# Altium PCB PCB_WPOWO_2025-01-21.pcbdoc
Units mil, origin at the board's own origin, x right, y up, seen from the top; angles counter-clockwise.
Board outline 4495 x 4400 mil, 2 copper layers (Top Layer, Bottom Layer); 3 components, 32 nets, 81 pads, 2 vias.
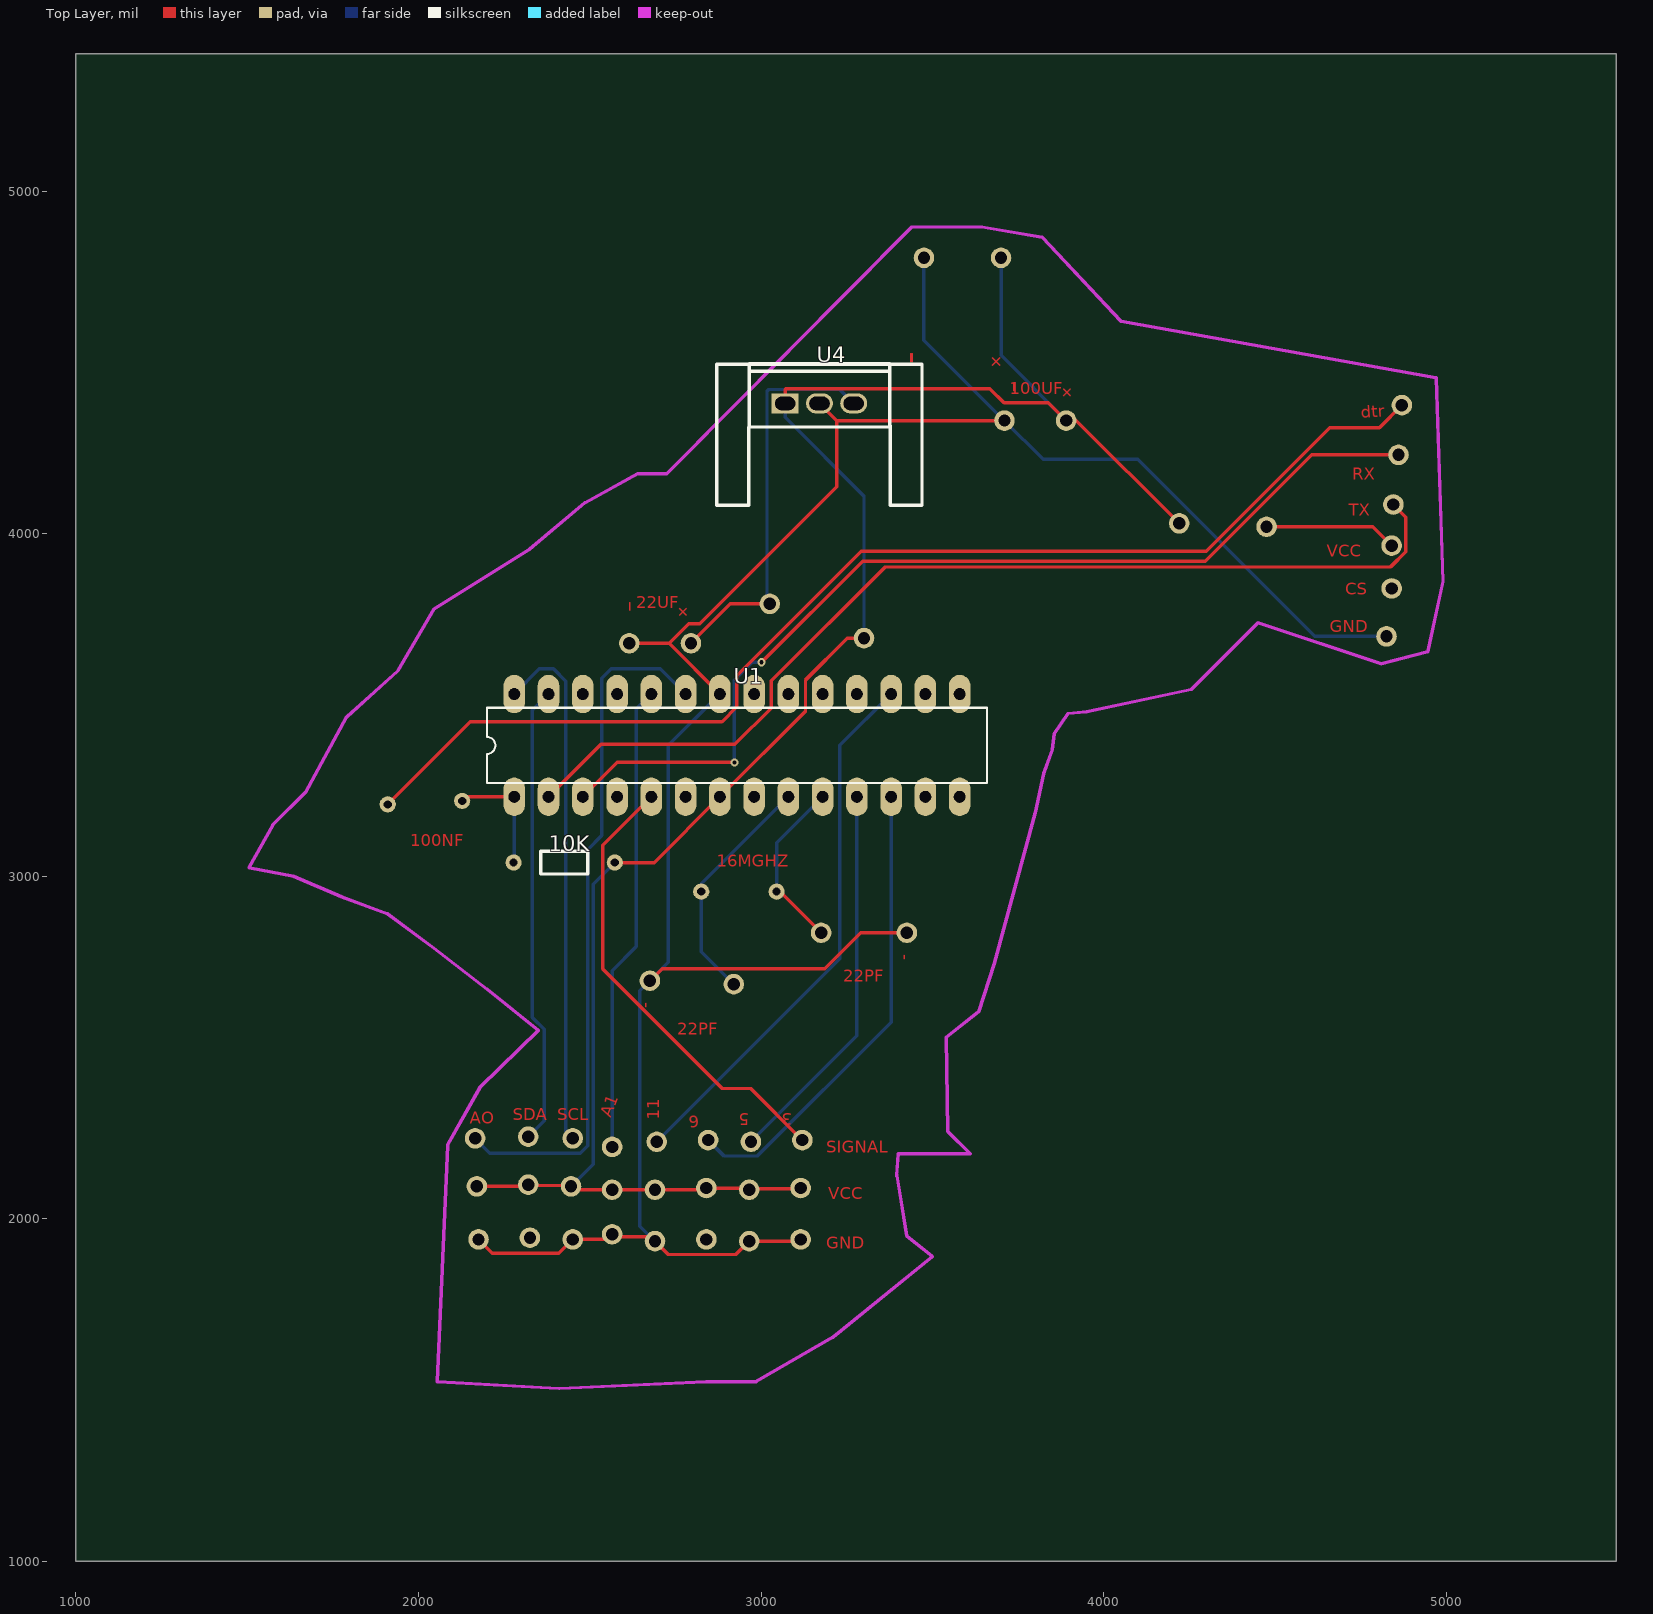
[diagram p0: Top Layer view]
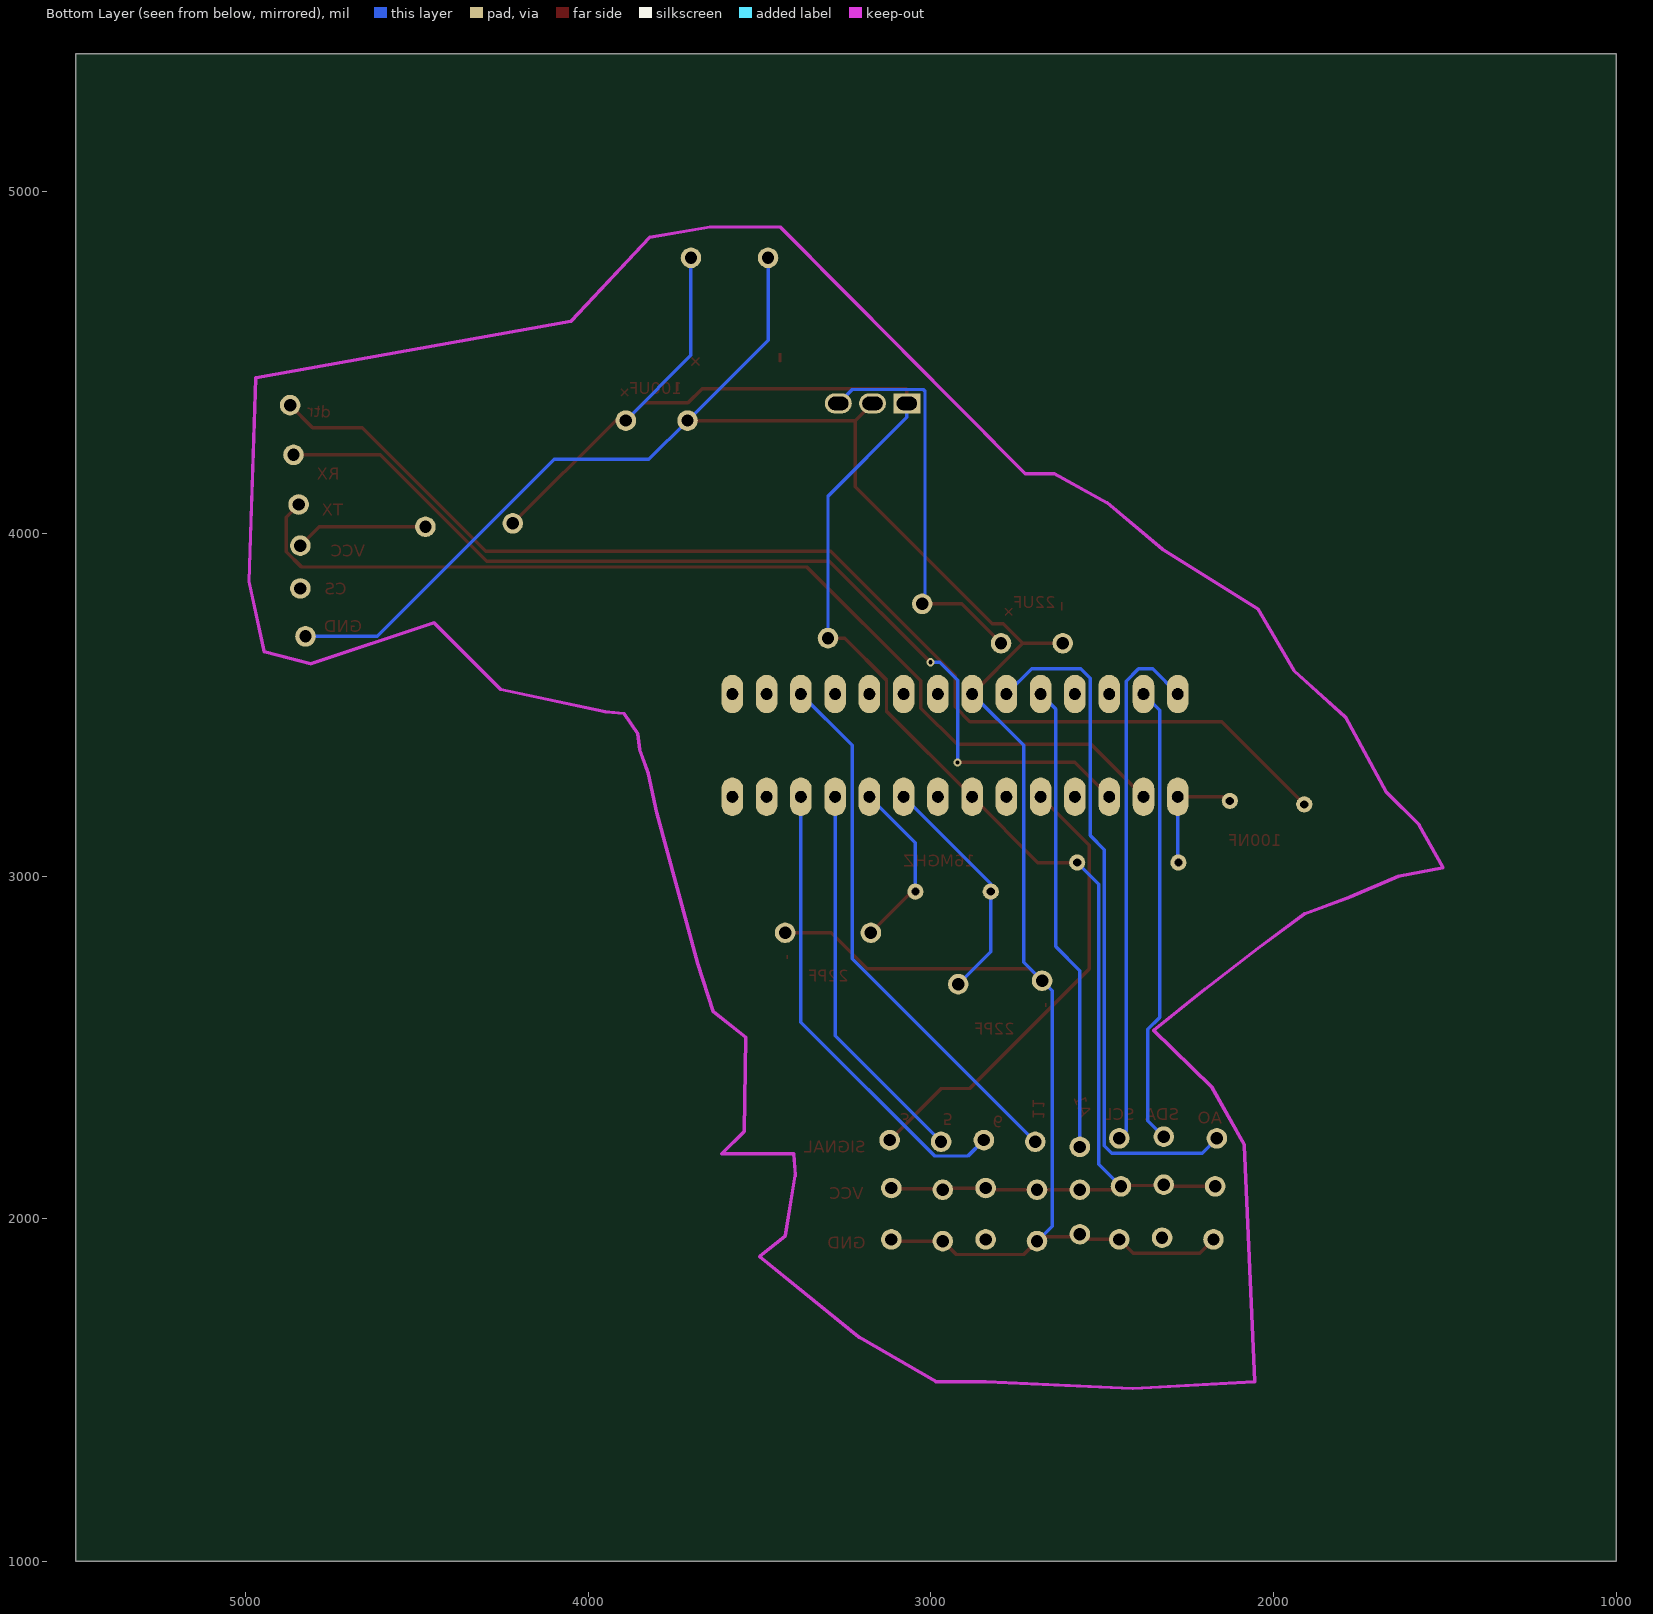
[diagram p1: Bottom Layer view, seen from below]

## Layer stack, top to bottom
Top Layer: signal copper (thickness not stored)
Dielectric: dielectric 12.6, FR-4, Dk 4.8
Bottom Layer: signal copper (thickness not stored)

## Board outline
5495,1000 1000,1000 1000,5400 5495,5400

## Components (designator, comment, footprint, x,y, rotation, side; value= is the part's Value field where it differs from the comment)
10K "20K" RES-TH_BD1.7-L3.5-P7.50-D0.5 2425,3040 r0 top
U1 "ATM328P" ATM328P 2910,3335 r0 top
U4 "L7805CV_C2895294" TO-220_L7805CV 3170,4380 r0 top

## Footprints (in the part's own frame and the unit in brackets; to place one, negate y for a bottom-side part, rotate by r counter-clockwise, add the part's x,y. Pads: shape width x height; smd on the part's side, far side on the other; paste and mask are expansions set on the pad)
ATM328P [mm]
  oval 1.6x2.845 hole 0.85 slot 0.855 at 90 deg paste+0 mask+0.102: 1(-16.02,-2.62) 2(-13.48,-2.62) 3(-10.94,-2.62) 4(-8.4,-2.62) 5(-5.86,-2.62) 6(-3.32,-2.62) 7(-0.78,-2.62) 8(1.76,-2.62) 9(4.3,-2.62) 10(6.84,-2.62) 11(9.38,-2.62) 12(11.92,-2.62) 13(14.46,-2.62) 14(17,-2.62) 15(17,5) 16(14.46,5) 17(11.92,5) 18(9.38,5) 19(6.84,5) 20(4.3,5) 21(1.76,5) 22(-0.78,5) 23(-3.32,5) 24(-5.86,5) 25(-8.4,5) 26(-10.94,5) 27(-13.48,5) 28(-16.02,5)
  silkscreen extent -18.05,-1.6 19.03,3.98
RES-TH_BD1.7-L3.5-P7.50-D0.5 [mm]
  round 1.2 hole 0.6 paste+0 mask+0.051: 1(-3.75,0) 2(3.75,0)
  silkscreen extent -1.75,-0.85 1.75,0.85
TO-220_L7805CV [mm]
  rect 2x1.5 hole 1 slot 1.5 at 0 deg paste+0 mask+0.051: 1(-2.54,0)
  oval 2x1.5 hole 1 slot 1.5 at 0 deg paste+0 mask+0.051: 2(0,0) 3(2.54,0)
  silkscreen extent -7.6,-7.55 7.6,2.95

## Free pads (board coordinates)
  round 47.24 hole 23.62 paste+0 mask+2: 1(1910,3210) 1(2127.36,3220) 6(2825,2955) 7(3045,2955)
  round 60 hole 36 paste+0 mask+2: 1(2320,2100) 1(2320,2240) 1(2325,1945) 1(2565,1955) 1(2565,2085) 1(2565,2210) 1(2840,1940) 1(2840,2090) 1(2845,2230) 1(3115,1940) 1(3115,2090) 1(3120,2230) 1(4840,3840) 1(4845,4085) 1(4870,4375) 2(2165,2235) 2(2170,2095) 2(2175,1940) 2(2445,2095) 2(2450,1940) 2(2450,2235) 2(2690,1935) 2(2690,2085) 2(2695,2225) 2(2965,1935) 2(2965,2085) 2(2970,2225) 2(4825,3700) 2(4840,3965) 2(4860,4230) 3(4475,4020) 4(4220,4030) 8(2675,2695) 9(2920,2685) 10(3175,2835) 11(3425,2835) 12(3475,4805) 13(3700,4805) 16(2615,3680) 16(3710,4330) 17(2795,3680) 17(3890,4330) 18(3025,3795) 19(3300,3695)

## Via types
v1: diameter 24, hole 12, Top Layer to Bottom Layer, tented both sides, 2 vias

## Nets (pads, with @x,y where several pads share a name; then routed paths per layer and width w, separated by ;. In a path a pad name is that pad's centre, name@x,y a point inside that pad or via, vN(x,y) a via of type N, cw(c..) or ccw(c..) an arc to the next point about the centre after c; other vN are vias at no path point)
D: pad.6 pad.9 U1.9 | length 691.5
  Bottom Layer w10: pad.9 2825,2780 pad.6 2825,2977.56 U1.9
DTR: pad.1@1910,3210 pad.1@4870,4375 | length 3496.1
  Top Layer w10: pad.1@1910,3210 2150.53,3450.53 2885.69,3450.53 2929.25,3494.09 2929.25,3585.45 3292.05,3948.25 4298.44,3948.25 4659.79,4309.6 4804.6,4309.6 pad.1@4870,4375
F: pad.7 pad.10 U1.10 | length 512.2
  Top Layer w10: pad.7 3055,2955 pad.10
  Bottom Layer w10: pad.7 3045,3097.56 U1.10
G: pad.2@4840,3965 pad.3 | length 387.8
  Top Layer w10: pad.3 4785,4020 pad.2@4840,3965
GND: pad.1@2325,1945 pad.1@2565,1955 pad.1@2840,1940 pad.1@3115,1940 pad.2@2175,1940 pad.2@2450,1940 pad.2@2690,1935 pad.2@2965,1935 pad.2@4825,3700 pad.8 pad.11 pad.12 pad.16 U1.22 U4.2 | length 7249.4
  Top Layer w10: pad.2@2175,1940 2215.54,1899.46 2409.46,1899.46 2450,1940 2557.5,1940 pad.1@2565,1947.5 ; pad.1@2565,1955 pad.1@2565,1947.5 ; pad.16@2615,3680 2731.14,3680 ; pad.8 2710.58,2730.58 3185.89,2730.58 3290.31,2835 pad.11 ; U1.22 2731.14,3680 ; pad.1@3115,1940 3110,1935 2965,1935 2925.99,1895.99 2729.01,1895.99 2690,1935 2677.5,1947.5 pad.1@2565,1947.5 ; U4.2 3220,4330 ; pad.16@3710,4330 3220,4330 ; 2731.14,3680 2788.26,3737.12 2820.21,3737.12 3220,4136.91 3220,4330
  Bottom Layer w10: pad.2@2690,1935 2645.91,1979.09 2645.91,2665.91 pad.8 2729.29,2749.29 2729.29,3381.85 U1.22 ; pad.12 3475,4565 3710,4330 3823.06,4216.94 4099.14,4216.94 4616.08,3700 pad.2@4825,3700
K: U1.8
MISO: U1.18
MOSI: U1.17
R1_1: 10K.1 pad.1@2127.36,3220 U1.1 | length 349.5
  Top Layer w10: pad.1@2127.36,3220 2139.21,3231.85 U1.1
  Bottom Layer w10: 10K.1 2279.29,3041.93 U1.1
RX: pad.2@4860,4230 U1.3 | length 2934.8
  Top Layer w10: U1.3 2579.58,3332.14 v1(2921.85,3332.14) ; v1(3000.97,3624.57) 3296.11,3919.71 4296.61,3919.71 4606.9,4230 pad.2@4860,4230
  Bottom Layer w10: v1(2921.85,3332.14) 2921.85,3572.18 2974.24,3624.57 v1(3000.97,3624.57)
SCK: U1.19
TX: pad.1@4845,4085 U1.2 | length 2998
  Top Layer w10: U1.2 2532.33,3384.89 2923.27,3384.89 3029.27,3490.89 3029.27,3570.16 3361.61,3902.5 4836.68,3902.5 4881.7,3947.52 4881.7,4048.3 pad.1@4845,4085
U1_4: U1.4
U1_5: pad.1@3120,2230 U1.5 | length 1350.3
  Top Layer w10: U1.5 2537.73,3090.29 2537.73,2729.32 2886.61,2380.44 2969.56,2380.44 pad.1@3120,2230
U1_6: U1.6
U1_7: pad.17@2795,3680 pad.18 U4.3 | length 1173.3
  Top Layer w10: pad.17@2795,3680 2910,3795 pad.18
  Bottom Layer w10: pad.18 3016.86,3803.14 3016.86,4414.97 3022.48,4420.59 3229.41,4420.59 U4.3
U1_11: pad.2@2970,2225 U1.11 | length 1135
  Bottom Layer w10: pad.2@2970,2225 3279.29,2534.29 U1.11
U1_12: pad.1@2845,2230 U1.12 | length 1372.9
  Bottom Layer w10: pad.1@2845,2230 2891.42,2183.58 2988.53,2183.58 3379.29,2574.34 U1.12
U1_13: U1.13
U1_14: U1.14
U1_15: U1.15
U1_16: U1.16
U1_17: pad.2@2695,2225 | length 1590.3
  Bottom Layer w10: pad.2@2695,2225 3229.29,2759.29 3229.29,3381.85 3379.29,3531.85
U1_20: U1.20
U1_21: U1.21
U1_23: pad.2@2165,2235 U1.23 | length 2023.3
  Bottom Layer w10: pad.2@2165,2235 2208.3,2191.7 2471.77,2191.7 2493.46,2213.39 2493.46,3077.5 2534.96,3119 2534.96,3578.21 2561.94,3605.19 2705.95,3605.19 U1.23
U1_24: pad.1@2565,2210 U1.24 | length 1369.2
  Bottom Layer w10: pad.1@2565,2210 2565,2724.45 2635.55,2795 2635.55,3488.11 U1.24
U1_25: U1.25
U1_26: U1.26
U1_27: pad.1@2320,2240 U1.27 | length 1344.8
  Bottom Layer w10: pad.1@2320,2240 2366.48,2286.48 2366.48,2553.55 2332.25,2587.78 2332.25,3484.81 U1.27
U1_28: pad.2@2450,2235 U1.28 | length 1538.1
  Bottom Layer w10: U1.28 2352.49,3605.05 2393.77,3605.05 2429.29,3569.53 2429.29,2255.71 pad.2@2450,2235
VCC: 10K.2 pad.1@2320,2100 pad.1@2565,2085 pad.1@2840,2090 pad.1@3115,2090 pad.2@2170,2095 pad.2@2445,2095 pad.2@2690,2085 pad.2@2965,2085 pad.4 pad.13 pad.17@3890,4330 pad.19 U1.7 U4.1 | length 5698.3
  Top Layer w10: pad.2@2170,2095 2317.5,2095 pad.1@2320,2097.5 ; pad.1@2320,2100 pad.1@2320,2097.5 ; 10K.2 2687.44,3040 U1.7 3129.29,3481.85 3129.29,3572.75 3251.54,3695 pad.19 ; pad.2@2965,2085 pad.2@2965,2087.5 ; U4.1 3070,4420.54 3072.24,4422.78 3667.68,4422.78 3708.62,4381.84 3838.16,4381.84 3890,4330 3920,4330 pad.4 ; pad.1@3115,2090 3112.5,2087.5 pad.2@2965,2087.5 ; pad.1@2320,2097.5 2442.5,2097.5 2445,2095 2455,2085 2565,2085 2690,2085 2835,2085 2840,2090 2962.5,2090 pad.2@2965,2087.5
  Bottom Layer w10: pad.2@2445,2095 2509.52,2159.52 2509.52,2976.88 10K.2 ; U4.1 3070,4339.47 3300,4109.47 pad.19 ; pad.13 3700,4520 pad.17@3890,4330

## Other copper
Top Layer:
  text "+" at 3691.08,4528.92 h39.37 r225
  text "-" at 3467.4,4495 h74.8 r90
  text "_" at 3727.72,4415 h35.43 r90
  text "+" at 3917.53,4407.53 h35.43 r135
  text "100UF" at 3725,4407.28 h35.43
  text "dtr" at 4751.24,4337.33 h35.43 r4
  text "RX" at 4725,4157.28 h35.43
  text "TX" at 4715,4052.28 h35.43
  text "VCC" at 4650,3932.28 h35.43
  text "CS" at 4705,3822.28 h35.43
  text "22UF" at 2635,3782.28 h35.43
  text "_" at 2607.72,3775 h35.43 r90
  text "+" at 2797.53,3767.53 h35.43 r135
  text "GND" at 4660,3712.28 h35.43
  text "100NF" at 1975,3087.28 h35.43
  text "16MGHZ" at 2870,3027.28 h35.43
  text "-" at 3432.72,2755 h35.43 r90
  text "22PF" at 3240,2692.28 h35.43
  text "-" at 2677.72,2615 h35.43 r90
  text "22PF" at 2755,2537.28 h35.43
  text "5" at 2965,2307.72 h35.43 r180
  text "3" at 3090,2307.72 h35.43 r180
  text "6" at 2818.46,2302.65 h35.43 r185
  text "A1" at 2561.54,2293.65 h35.43 r69
  text "11" at 2702.72,2290 h35.43 r90
  text "SDA" at 2275,2287.28 h35.43
  text "SCL" at 2405,2287.28 h35.43
  text "AO" at 2150,2277.28 h35.43
  text "SIGNAL" at 3190,2192.28 h35.43
  text "VCC" at 3195,2057.28 h35.43
  text "GND" at 3190,1912.28 h35.43